# Altium PCB PCB_Add.PcbDoc
Units mm, origin at the board's own origin, x right, y up, seen from the top; angles counter-clockwise.
Board outline 67.18 x 29.34 mm, 2 copper layers (Top Layer, Bottom Layer); 34 components, 25 nets, 104 pads, 0 vias.
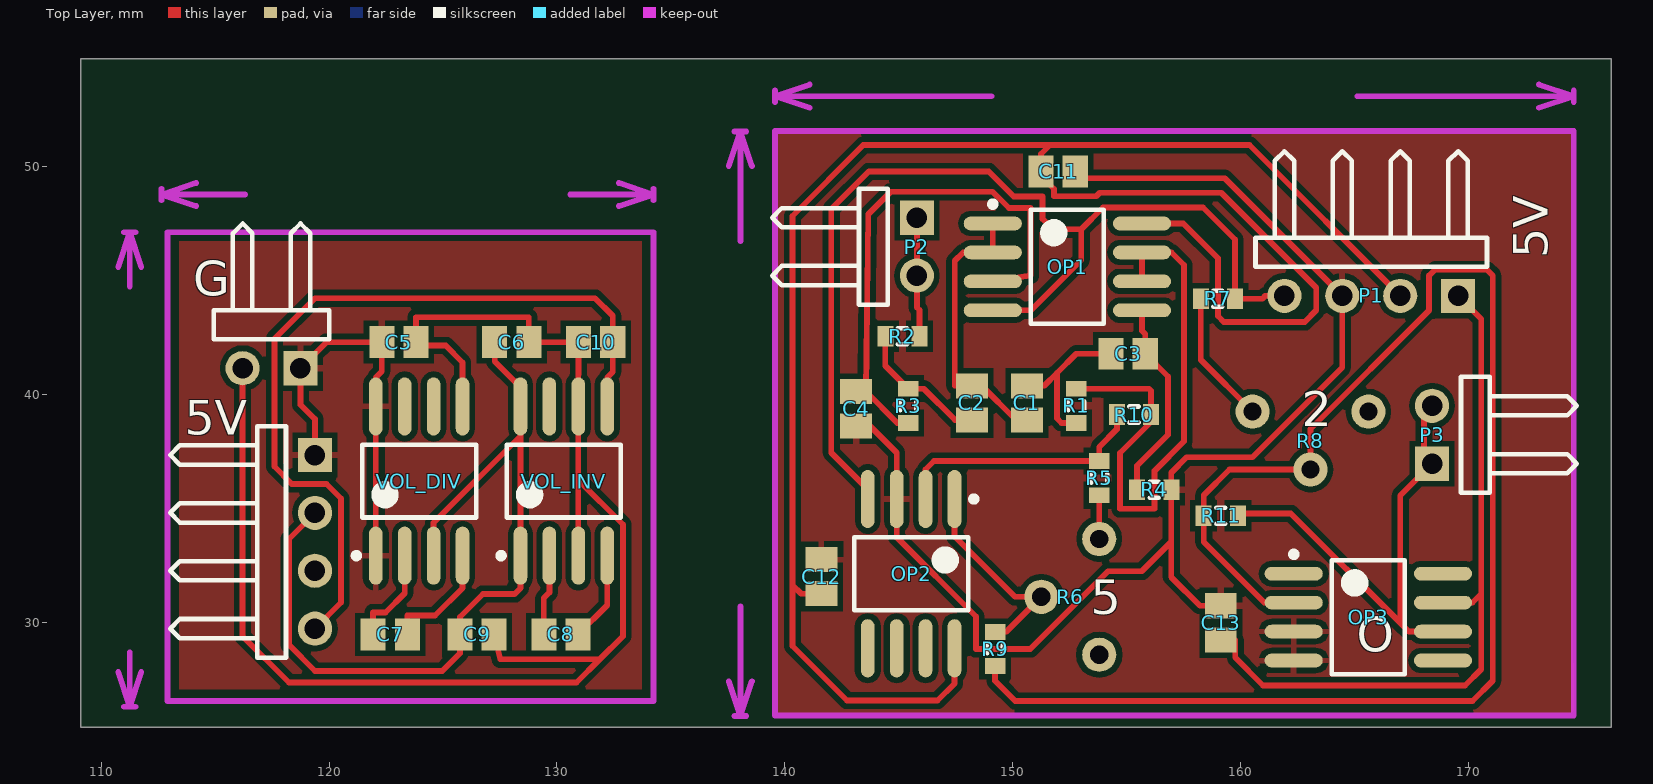
[diagram p0: Top Layer view]
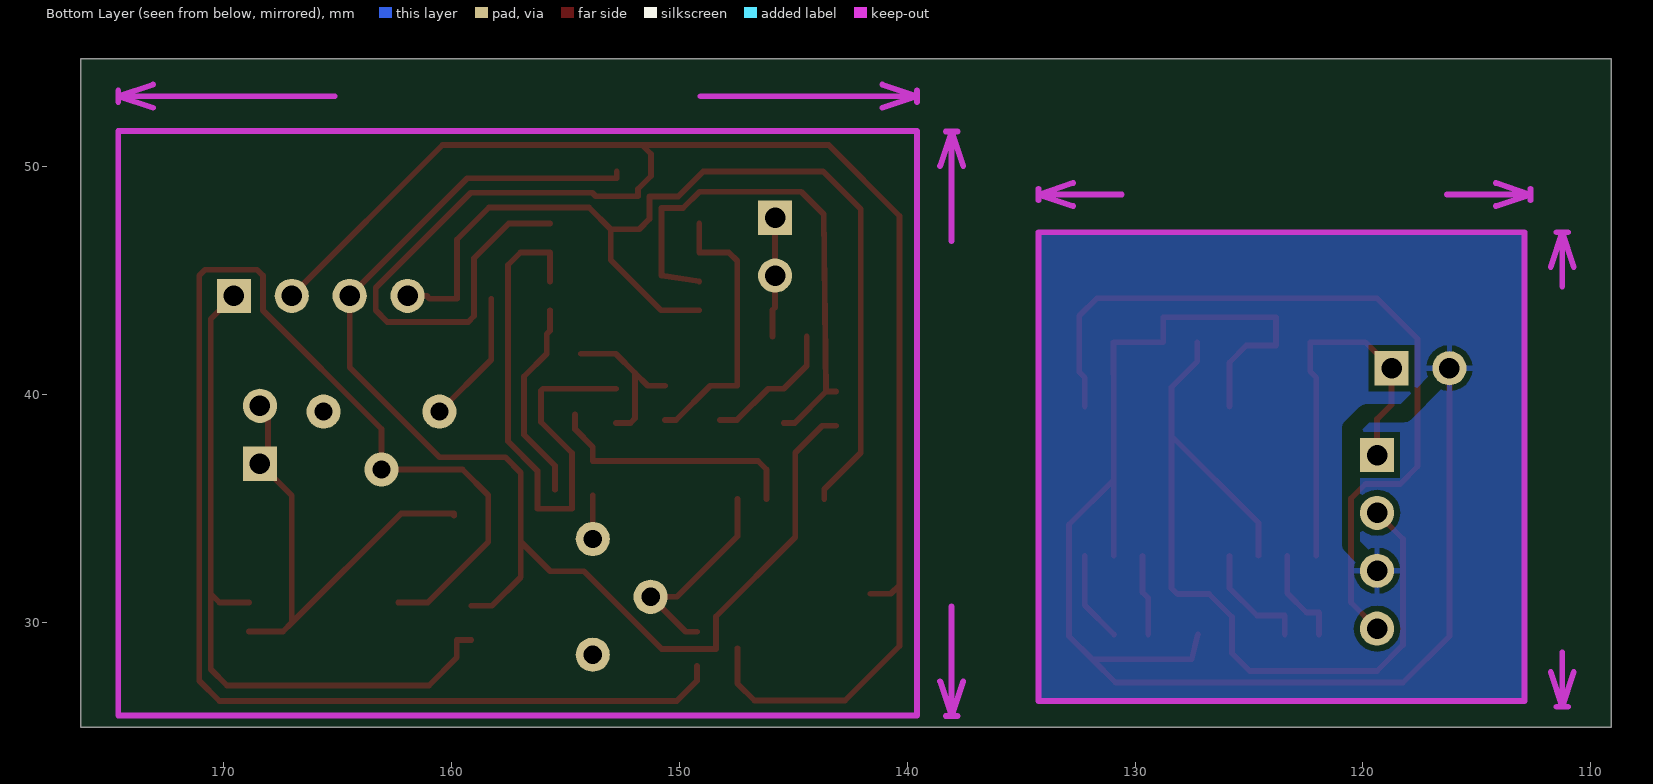
[diagram p1: Bottom Layer view, seen from below]

## Layer stack, top to bottom
Top Solder: solder mask 0.0102, Solder Resist, Dk 3.5
Top Layer: signal copper 0.0356
Dielectric 1: dielectric 0.32, FR-4, Dk 4.8
Bottom Layer: signal copper 0.0356
Bottom Solder: solder mask 0.0102, Solder Resist, Dk 3.5

## Board outline
109.093,25.4 109.093,54.737 176.276,54.737 176.276,25.4

## Design rules (kind name [scope] priority, off if disabled: settings)
Clearance [All] p1: gap=0.254
PolygonConnect [All] p1: connectstyle=Relief reliefconductorwidth=0.254 reliefentries=4 polygonreliefangle="90 Angle" airgapwidth=0.254
RoutingVias [All] p1: holewidth=0.711 width=1.27 viastyle="Through Hole" minholewidth=0.711 minwidth=1.27 maxholewidth=0.711 maxwidth=1.27
SolderMaskExpansion [All] p1: expansion=0.102
Width [All] p1: maxlimit=0.254 minlimit=0.254 preferedwidth=0.254
30 further rules are at their usual default settings.

## Components (designator, comment, footprint, x,y, rotation, side; value= is the part's Value field where it differs from the comment)
5V "Header 4H" HDR1X4H 119.38,37.338 r270 top (schematic designator P5)
C1 "Cap Pol3" C0805 150.622,39.624 r90 top
C2 "Cap Pol3" C0805 148.209,39.624 r270 top
C3 "Cap Pol3" C0805 155.067,41.783 r0 top
C4 "Cap Pol3" C0805 143.129,39.37 r270 top
C5 "Cap Pol3" C0805 123.063,42.291 r0 top
C6 "Cap Pol3" C0805 128.016,42.291 r0 top
C7 "Cap Pol3" C0805 122.682,29.464 r0 top
C8 "Cap Pol3" C0805 130.175,29.464 r0 top
C9 "Cap Pol3" C0805 126.492,29.464 r0 top
C10 "Cap Pol3" C0805 131.699,42.291 r0 top
C11 "Cap Pol3" C0805 151.994,49.784 r0 top
C12 "Cap Pol3" C0805 141.605,32.004 r90 top
C13 "Cap Pol3" C0805 159.131,29.972 r90 top
G "Header 2H" HDR1X2H 118.745,41.148 r180 top (schematic designator P4)
OP1 "TLV3542" SOIC127P600X175-8N 152.4,45.593 r0 top
OP2 "TLV3542" SOIC127P600X175-8N 145.542,32.131 r270 top
OP3 "O" SOIC127P600X175-8N 165.608,30.226 r0 top
P1 "Header 4H" HDR1X4H 169.545,44.323 r180 top
P2 "Header 2H" HDR1X2H 145.796,47.752 r270 top
P3 "Header 2H" HDR1X2H 168.402,36.957 r90 top
R1 "Res3" J1-0603 152.781,39.497 r90 top
R2 "Res3" J1-0603 145.161,42.545 r180 top
R3 "Res3" J1-0603 145.415,39.497 r90 top
R4 "Res3" J1-0603 156.21,35.814 r0 top
R5 "Res3" J1-0603 153.797,36.322 r270 top
R6 "5" 3362P 153.67,31.115 r270 top
R7 "Res3" J1-0603 159.004,44.196 r180 top
R8 "2" 3362P 163.068,39.116 r0 top
R9 "Res3" J1-0603 149.225,28.829 r270 top
R10 "Res3" J1-0603 155.321,39.116 r180 top
R11 "Res3" J1-0603 159.131,34.671 r0 top
VOL_DIV "MAX1044" SOIC127P600X175-8N 123.952,36.195 r90 top
VOL_INV "MAX1044" SOIC127P600X175-8N 130.302,36.195 r90 top

## Footprints (in the part's own frame and the unit in brackets; to place one, negate y for a bottom-side part, rotate by r counter-clockwise, add the part's x,y. Pads: shape width x height; smd on the part's side, far side on the other; paste and mask are expansions set on the pad)
3362P [mm]
  round 1.5 hole 0.8: 1(-2.54,0.127) 2(2.54,0.127) 3(0,-2.413)
C0805 [mm] "Chip Capacitor, Body 2.0x1.3mm, IPC High Density"
  rect 1.1x1.4 smd: 1(-0.75,0) 2(0.75,0)
  body extent -1.1,-0.72 1.1,0.72, height 1.4
HDR1X2H [mm] "Connector; Header; 2 Position; Right Angle"
  rect 1.5x1.5 hole 0.9: 1(0,0)
  round 1.5 hole 0.9: 2(2.54,0)
  silkscreen extent -1.27,-6.35 3.81,-1.27
HDR1X4H [mm] "Connector; Header; 4 Position; Right Angle"
  rect 1.5x1.5 hole 0.9: 1(0,0)
  round 1.5 hole 0.9: 2(2.54,0) 3(5.08,0) 4(7.62,0)
  silkscreen extent -1.27,-6.35 8.89,-1.27
J1-0603 [mm] "Chip Resistor, Body 1.6x0.8mm, IPC High Density"
  rect 0.7x0.9 smd: 1(-0.75,0) 2(0.75,0)
  silkscreen extent -0.2,-0.35 0.2,0.35, body extent -0.85,-0.48 0.85,0.48, height 0.9
SOIC127P600X175-8N [mm] "SOIC, 8-Leads, Body 4.90x3.90mm, Pitch 1.27mm, IPC Medium Density"
  oval 2.55x0.6 smd: 1(-3.275,1.905) 2(-3.275,0.635) 3(-3.275,-0.635) 4(-3.275,-1.905) 5(3.275,-1.905) 6(3.275,-0.635) 7(3.275,0.635) 8(3.275,1.905)
  silkscreen extent -3.4,-2.5 1.6,2.88, body extent -2,-2.5 2,2.5, height 1.75

## Part data
5V P1: "Header, 4-Pin, Right Angle"
C1 C2 C3 C4 C5 C6 C7 C8 C9 C10 C11 C12 C13: "Polarized Capacitor (Surface Mount)"
G P2 P3: "Header, 2-Pin, Right Angle"
OP3: library part OPA388IDR
R1 R2 R3 R4 R5 R7 R9 R10 R11: "Resistor"
R6 R8: library part Res_3362P

## Nets (pads, with @x,y where several pads share a name; then routed paths per layer and width w, separated by ;. In a path a pad name is that pad's centre, name@x,y a point inside that pad or via, vN(x,y) a via of type N, cw(c..) or ccw(c..) an arc to the next point about the centre after c; other vN are vias at no path point)
+2.5V: C11.1 C12.1 OP1.8 OP2.8 P1.2 | length 89
  Top Layer w0.254: C12.1 140.716,31.254 140.335,31.635 ; OP2.8 147.447,27.305 146.702,26.56 142.731,26.56 140.335,28.956 140.335,31.635 ; OP1.8 157.48,47.498 159.004,45.974 159.004,43.434 159.258,43.18 162.814,43.18 163.322,43.688 163.322,44.679 159.156,48.844 153.822,48.844 153.67,48.692 151.813,48.692 151.813,49.012 151.244,49.581 C11.1 151.244,50.546 151.637,50.939 ; P1.2 160.389,50.939 151.637,50.939 ; 140.335,31.635 140.335,47.828 143.446,50.939 151.637,50.939
+5V: C13.1 OP3.7 P1.1 | length 31.6
  Top Layer w0.254: C13.1 159.766,29.222 159.766,28.448 160.985,27.229 169.85,27.229 170.561,27.94 170.561,31.242 ; OP3.7 170.18,30.861 170.561,31.242 ; P1.1 170.561,43.307 170.561,31.242
-2.5V: OP1.4 OP2.4 P1.4 R7.1 | length 45.4
  Top Layer w0.254: OP2.4 143.637,35.839 142.037,37.44 142.037,48.133 143.688,49.784 148.946,49.784 150.043,48.687 151.305,48.687 151.305,47.701 151.762,47.244 153.01,47.244 ; OP1.4 150.8,43.688 153.01,45.898 153.01,47.244 ; P1.4 161.087,44.323 160.96,44.196 R7.1 159.754,46.792 158.351,48.195 153.961,48.195 153.01,47.244
GND: C4.2 C11.2 C12.2 C13.2 OP2.3 OP3.3 OP3.4 P1.3 R4.2 | length 56.8
  Top Layer w0.254: C4.2 143.727,38.62 144.907,37.44 OP2.3 144.907,33.731 148.387,30.251 148.387,28.829 150.773,28.829 154.178,32.234 155.666,32.234 156.96,33.528 ; C11.2 152.744,49.479 159.309,49.479 P1.3 164.465,41.173 160.528,37.236 157.632,37.236 156.96,36.564 R4.2 156.96,33.528 ; C13.2 158.217,30.722 156.96,31.979 156.96,33.528
NetC1_1: C1.1 C2.1 OP1.1 OP1.2 | length 12.4
  Top Layer w0.254: OP1.1 OP1.2 147.828,46.228 147.459,45.859 147.459,40.374 C2.1 148.641,40.374 150.141,38.874 C1.1
NetC1_2: C1.2 C3.1 R1.1 | length 7.2
  Top Layer w0.254: C1.2 151.384,40.374 151.943,40.933 ; R1.1 152.146,38.747 151.943,38.95 151.943,40.933 ; C3.1 152.793,41.783 151.943,40.933
NetC2_2: C2.2 R2.2 R3.2 | length 6.1
  Top Layer w0.254: R2.2 144.411,41.251 R3.2 146.101,40.247 147.474,38.874 C2.2
NetC3_2: C3.2 OP1.5 R4.1 | length 8.9
  Top Layer w0.254: R4.1 155.46,36.867 156.82,38.227 156.82,40.78 C3.2 155.817,42.647 155.675,42.789 OP1.5
NetC4_1: C4.1 OP1.3 R3.1 | length 23.1
  Top Layer w0.254: C4.1 C4.1@143.561,40.12 ; R3.1 144.934,38.747 C4.1@143.561,40.12 ; OP1.3 150.781,45.212 150.781,48.179 149.832,48.179 149.116,48.895 144.653,48.895 143.662,47.904 C4.1@143.561,40.12
NetC6_1: 5V.2 C6.1 C9.1 VOL_DIV.3 VOL_INV.1 VOL_INV.8 | length 37.4
  Top Layer w0.254: 5V.2 118.237,33.655 118.237,29.007 119.38,27.864 124.968,27.864 125.742,28.638 C9.1 125.742,30.226 126.758,31.242 128.143,31.242 128.397,31.496 VOL_INV.1 128.397,38.176 ; VOL_DIV.3 124.587,34.366 128.397,38.176 ; C6.1 127.266,41.441 128.397,40.31 VOL_INV.8 128.397,38.176
NetC7_1: C7.1 VOL_DIV.2 | length 4.4
  Top Layer w0.254: C7.1 121.932,30.429 122.479,30.429 123.317,31.267 VOL_DIV.2
NetC7_2: C7.2 VOL_DIV.4 | length 5.2
  Top Layer w0.254: C7.2 123.432,30.29 124.651,30.29 125.857,31.496 VOL_DIV.4
NetC8_1: C8.1 VOL_INV.2 | length 3.6
  Top Layer w0.254: C8.1 129.425,31.064 129.667,31.306 VOL_INV.2
NetC8_2: C8.2 VOL_INV.4 | length 4
  Top Layer w0.254: C8.2 132.207,30.746 VOL_INV.4
NetC10_2: 5V.4 C10.2 VOL_INV.5 | length 35.3
  Top Layer w0.254: 5V.4 120.523,30.861 120.523,35.433 119.888,36.068 118.364,36.068 117.602,36.83 117.602,42.443 119.38,44.221 131.674,44.221 132.449,43.446 C10.2 132.449,40.984 132.207,40.742 VOL_INV.5
NetOP1_6: OP1.6 OP1.7 R1.2 R10.1 | length 25.2
  Top Layer w0.254: R1.2 155.981,40.247 156.071,40.157 R10.1 156.071,38.786 154.711,37.426 154.711,34.976 156.229,34.976 156.229,36.645 157.523,37.939 157.523,45.677 156.972,46.228 OP1.7 OP1.6
NetOP2_1: OP2.1 R6.3 R9.1 | length 9.2
  Top Layer w0.254: OP2.1 147.447,33.77 150.102,31.115 R6.3 149.721,29.579 R9.1
NetOP2_2: OP2.2 R5.1 R10.2 | length 11.4
  Top Layer w0.254: OP2.2 146.177,36.703 146.546,37.072 R5.1 153.797,37.694 154.571,38.468 R10.2
NetOP3_2: OP3.2 R8.3 R9.2 R11.1 | length 66.9
  Top Layer w0.254: R9.2 149.225,27.432 150.114,26.543 170.18,26.543 171.069,27.432 171.069,45.212 170.815,45.466 168.529,45.466 168.275,45.212 168.275,43.688 163.068,38.481 R8.3 159.512,36.703 158.381,35.572 R11.1 158.381,33.516 161.036,30.861 OP3.2
NetOP3_6: OP3.6 P3.1 P3.2 R11.2 | length 21.6
  Top Layer w0.254: R11.2 159.881,34.773 162.204,34.773 167.005,29.972 ; P3.2 168.046,39.141 168.046,37.313 P3.1 167.005,35.56 167.005,29.972 ; OP3.6 167.386,29.591 167.005,29.972
NetP2_1: P2.1 P2.2 R2.1 | length 5.3
  Top Layer w0.254: P2.1 P2.2 145.796,43.815 145.911,43.7 R2.1
NetR5_2: R5.2 R6.1 | length 1.9
  Top Layer w0.254: R6.1 R5.2
NetR7_2: R7.2 R8.1 | length 5.9
  Top Layer w0.254: R7.2 158.254,41.517 R8.1
P5V: 5V.1 C5.1 G.1 VOL_DIV.1 VOL_DIV.8 | length 17.6
  Top Layer w0.254: 5V.1 119.38,38.913 118.745,39.548 G.1 119.888,42.291 C5.1 122.313,41.008 122.047,40.742 VOL_DIV.8 VOL_DIV.1
PGND: 5V.3 C5.2 C6.2 C9.2 C10.1 G.2 VOL_DIV.5 VOL_INV.3 VOL_INV.6 | length 66.4
  Top Layer w0.254: G.2 116.205,29.388 118.237,27.356 130.861,27.356 131.877,28.372 ; VOL_DIV.5 125.857,41.402 125.12,42.139 123.813,42.139 C5.2 123.813,43.383 128.766,43.383 C6.2 C10.1 130.949,40.881 130.937,40.869 VOL_INV.6 130.937,36.246 ; C9.2 127.508,28.372 131.877,28.372 ; VOL_INV.3 130.937,36.246 ; 130.937,36.246 132.893,34.29 132.893,29.388 131.877,28.372
pads on no net: OP2.5 OP2.6 OP2.7 OP3.1 OP3.5 OP3.8 R6.2 R8.2 VOL_DIV.6 VOL_DIV.7 VOL_INV.7

## Polygon pours and split planes (outlines as drawn)
GND on Top Layer "GND" (solid, pour order 0): 139.7,51.435 139.7,26.035 148.59,26.035 174.625,26.035 174.498,51.308 174.498,51.435
P5V on Top Layer "P5V" (solid, pour order 10): 113.03,46.99 113.03,26.67 134.112,26.67 134.112,46.99
PGND on Bottom Layer "PGND" (solid, pour order 4): 113.03,46.99 113.03,26.67 134.112,26.67 134.112,46.99

## Keep-outs
Keep-Out Layer:
  lines w0.254: 110.744,27.813 111.252,26.289 ; 110.744,45.593 111.252,47.117 ; 110.998,26.289 111.506,26.289 ; 110.998,47.117 111.506,47.117 ; 111.252,28.679 111.252,26.289 ; 111.252,44.727 111.252,47.117 ; 111.76,27.813 111.252,26.289 ; 111.76,45.593 111.252,47.117 ; 112.649,48.514 112.649,49.022 ; 114.173,48.26 112.649,48.768 ; 114.173,49.276 112.649,48.768 ; 116.309,48.768 112.649,48.768 ; 130.579,48.768 134.239,48.768 ; 132.715,48.26 134.239,48.768 ; 132.715,49.276 134.239,48.768 ; 134.239,48.514 134.239,49.022 ; 137.541,27.409 138.049,25.885 ; 137.541,50.015 138.049,51.539 ; 137.795,25.885 138.303,25.885 ; 137.795,51.539 138.303,51.539 ; 138.049,30.688 138.049,25.885 ; 138.049,46.736 138.049,51.539 ; 138.557,27.409 138.049,25.885 ; 138.557,50.015 138.049,51.539 ; 139.573,52.832 139.573,53.34 ; 141.097,52.578 139.573,53.086 ; 141.097,53.594 139.573,53.086 ; 149.075,53.086 139.573,53.086 ; 165.123,53.086 174.625,53.086 ; 173.101,52.578 174.625,53.086 ; 173.101,53.594 174.625,53.086 ; 174.625,52.832 174.625,53.34 ; 112.903,26.543 134.239,26.543 134.239,47.117 112.903,47.117 112.903,26.543 ; 139.573,25.908 139.573,46.609 139.573,50.8 139.573,51.562 174.625,51.562 174.625,25.908 139.573,25.908
  text "35.052 (mm)" at 149.329,52.172 h1.52
  text "21.59 (mm)" at 116.563,47.854 h1.52
  text "25.654 (mm)" at 138.963,30.942 h1.52 r90
  text "20.828 (mm)" at 112.166,28.933 h1.52 r90

## Silkscreen, mask and mechanical layers (free items; w line width, h text height)
Top Overlay:
  text "5V" at 173.482,45.974 h1.52 r90